# Altium PCB new_GD.PcbDoc
Units mm, origin at the board's own origin, x right, y up, seen from the top; angles counter-clockwise.
Board outline 65.02 x 13.46 mm, 2 copper layers (Top Layer, Bottom Layer); 16 components, 12 nets, 40 pads, 16 vias.
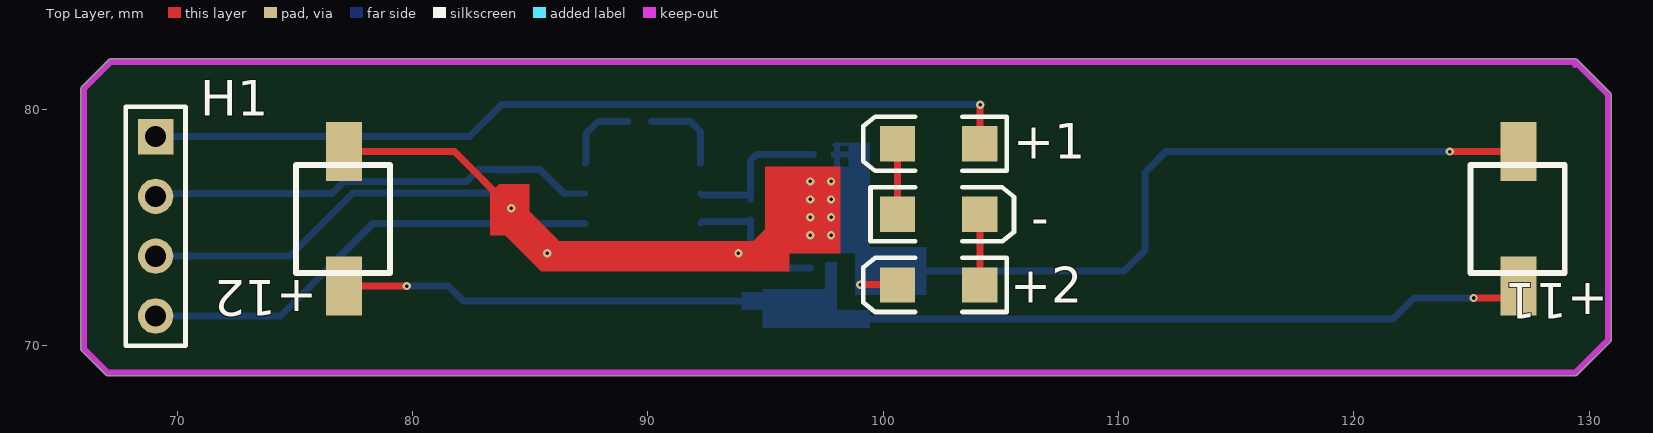
[diagram p0: Top Layer view]
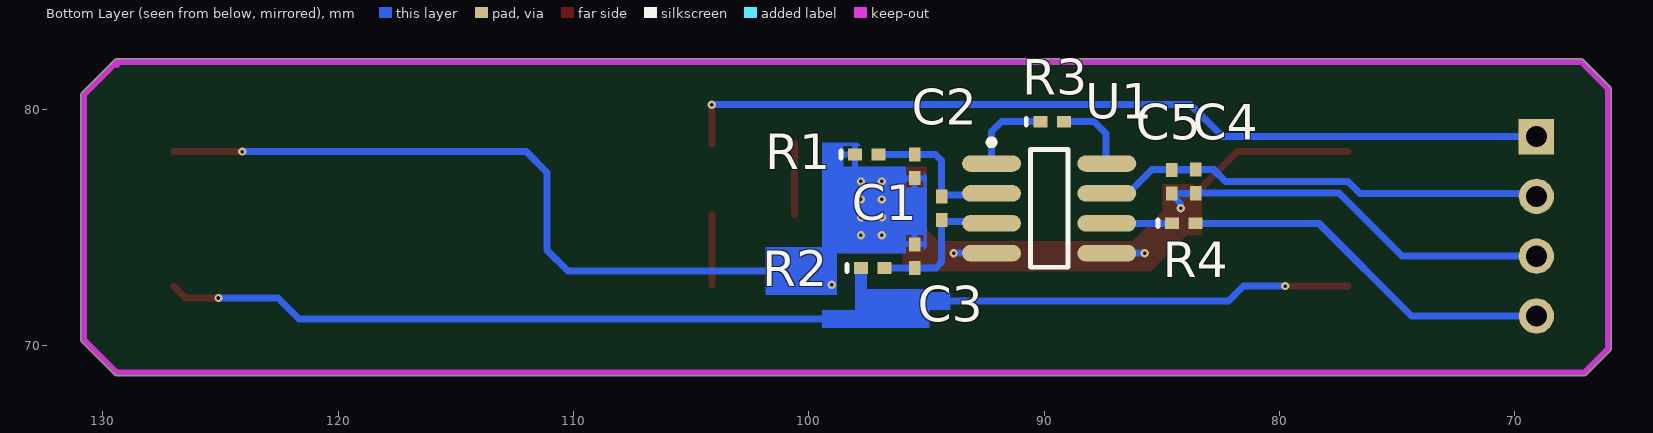
[diagram p1: Bottom Layer view, seen from below]

## Layer stack, top to bottom
Top Solder: solder mask 0.0102, Solder Resist, Dk 3.5
Top Layer: signal copper 0.0356
Dielectric 1: dielectric 0.32, FR-4, Dk 4.8
Bottom Layer: signal copper 0.0356
Bottom Solder: solder mask 0.0102, Solder Resist, Dk 3.5

## Board outline
66.966,68.744 65.95,69.76 65.95,69.759 cw(c66.04,69.85) 65.913,69.85 65.913,80.899 cw(c66.04,80.899) 65.95,80.99 65.95,80.989 67.093,82.132 67.092,82.132 cw(c67.183,82.042) 67.183,82.169 129.413,82.169 cw(c129.413,82.042) 129.504,82.132 129.503,82.132 130.9,80.735 130.9,80.736 cw(c130.81,80.645) 130.937,80.645 130.937,70.231 cw(c130.81,70.231) 130.9,70.14 130.9,70.141 129.503,68.744 129.504,68.744 cw(c129.413,68.834) 129.413,68.707 67.056,68.707 cw(c67.056,68.834)

## Design rules (kind name [scope] priority, off if disabled: settings)
Clearance [All] p1: gap=0 ignorepadtopadclearanceinfootprint=FALSE
PolygonConnect [All] p1: connectstyle=Relief reliefconductorwidth=0.254 reliefentries=4 polygonreliefangle="90 Angle" airgapwidth=0.254
RoutingVias [All] p1: holewidth=0.711 width=1.27 viastyle="Through Hole" minholewidth=0.711 minwidth=1.27 maxholewidth=0.711 maxwidth=1.27
SolderMaskExpansion [All] p1: expansion=0.102
Width [All] p1: maxlimit=1 minlimit=0.1 preferedwidth=0.1 minimp=50.000000 maximp=50.000000 favimp=50.000000
30 further rules are at their usual default settings.

## Classes and differential pairs
component class Sheet1: +1 +2 +12 - C1 C2 C3 C4 C5 H1 R1 R2 R3 R4 U1

## Components (designator, comment, footprint, x,y, rotation, side; value= is the part's Value field where it differs from the comment)
+1 "1206LED" 3.2X1.6X1.1 102.362,78.565 r180 top
+2 "1206LED" 3.2X1.6X1.1 102.362,72.565 r180 top
+11 "BPW34S" BPW34S 124.968,73.152 r90 top
+12 "BPW34S" BPW34S 75.057,73.152 r90 top
- "1206LED" 3.2X1.6X1.1 102.362,75.565 r0 top (schematic designator D2)
C1 "1nF" 0402 94.361,75.819 r90 bottom
C2 "1nF" 0402 95.504,77.605 r90 bottom
C3 "1nF" 0402 95.504,73.787 r90 bottom
C4 "0.1nF" 0402 83.566,76.962 r270 bottom
C5 "10nF" 0402 84.582,76.954 r270 bottom
H1 "Header 4" HDR1X4 69.088,78.867 r270 top
R1 "1K" 0402-A 97.536,78.105 r180 bottom
R2 "1K" 0402-A 97.282,73.279 r180 bottom
R3 "10K" 0402-A 89.662,79.502 r180 bottom
R4 "100R" 0402-A 84.066,75.184 r180 bottom
U1 "AD623" SO8_M 89.789,75.819 r180 bottom

## Footprints (in the part's own frame and the unit in brackets; to place one, negate y for a bottom-side part, rotate by r counter-clockwise, add the part's x,y. Pads: shape width x height; smd on the part's side, far side on the other; paste and mask are expansions set on the pad)
3.2X1.6X1.1 [mm] "SMT LED; 2 Flat Leads"
  rect 1.5x1.5 smd: 1(-1.75,0) 2(1.75,0)
  silkscreen extent -2.9,-1.15 3.2,1.15
0402 [mm] "Chip Capacitor, Body 1.0x0.5mm, IPC High Density"
  rect 0.6x0.5 smd: 1(-0.5,0) 2(0.5,0)
  body extent -0.55,-0.3 0.55,0.3, height 1.3
0402-A [mm] "Chip Inductor, Body 1.0x0.5mm, IPC High Density"
  rect 0.6x0.5 smd: 1(-0.5,0) 2(0.5,0)
  silkscreen extent -1.1,-0.15 -1.1,0.15, body extent -0.55,-0.3 0.55,0.3, height 0.55
BPW34S [mil]
  rect 98.43x60 smd: 1(-25,-80) 2(200,-80)
  silkscreen extent -3,-157 177,0
HDR1X4 [mm] "Connector; Header; 4 Position"
  rect 1.5x1.5 hole 0.9: 1(0,0)
  round 1.5 hole 0.9: 2(2.54,0) 3(5.08,0) 4(7.62,0)
  silkscreen extent -1.27,-1.27 8.89,1.27
SO8_M [mm] "SOIC, 8-Leads, Body 4.9x3.9mm, Pitch 1.27mm, IPC Low Density"
  oval 2.5x0.7 smd: 1(-2.45,1.905) 2(-2.45,0.635) 3(-2.45,-0.635) 4(-2.45,-1.905) 5(2.45,-1.905) 6(2.45,-0.635) 7(2.45,0.635) 8(2.45,1.905)
  silkscreen extent -2.58,-2.5 0.8,2.93, body extent -2,-2.5 2,2.5, height 1.75

## Part data
+1 +2 -: library part LED0, "Typical INFRARED GaAs LED", LatestRevisionDate=08-Jul-2005, LatestRevisionNote="Mech Layer 1 removed.", PackageDescription="LED; 2 Leads", PackageReference=LED-0, Published=8-Jun-2000, Publisher="Altium Limited"
+11 +12: library part "Photo Sen", "Photosensitive Diode", LatestRevisionDate=17-Jul-2002, LatestRevisionNote="Re-released for DXP Platform.", PackageReference=PIN2, Published=24-Mar-1999, Publisher="Altium Limited"
C1 C2 C3 C4 C5: library part CAP, "电容"
H1: "Header, 4-Pin", LatestRevisionDate=17-Jul-2002, LatestRevisionNote="Re-released for DXP Platform.", Publisher="Altium Limited"
R1 R2 R3 R4: library part RES, "电阻"
U1: "IC"

## Via types
v1: diameter 0.35, hole 0.15, Top Layer to Bottom Layer, tented both sides, 16 vias

## Nets (pads, with @x,y where several pads share a name; then routed paths per layer and width w, separated by ;. In a path a pad name is that pad's centre, name@x,y a point inside that pad or via, vN(x,y) a via of type N, cw(c..) or ccw(c..) an arc to the next point about the centre after c; other vN are vias at no path point)
Net+1_1: +1.1 H1.1 | length 37.3
  Top Layer w0.3: +1.1 104.126,78.579 v1(104.126,80.223)
  Bottom Layer w0.3: H1.1 82.423,78.867 83.779,80.223 v1(104.126,80.223)
Net+1_2: +1.2 -.1 | length 3
  Top Layer w0.3: -.1 +1.2
Net+2_1: +2.1 -.2 | length 3
  Top Layer w0.3: +2.1 -.2
Net+2_2: +2.2 +11.2 +12.2 C2.1 C3.2 C4.2 C5.2 H1.3 R1.1 U1.4 U1.5 | length 61.2
  Top Layer w0.3: +12.2 81.788,78.232 v1(84.201,75.819) ; v1(99.03,72.574) 100.603,72.574 +2.2 ; v1(124.079,78.232) +11.2
  Bottom Layer w0.254: 79.114,76.465 79.116,76.463 ; C4.2@83.564,76.463 C4.2 C4.2@83.57,76.458 ; C5.2@84.578,76.458 C5.2
  Bottom Layer w0.3: H1.3 74.803,73.787 77.481,76.465 79.114,76.465 ; 79.116,76.463 C4.2@83.564,76.463 ; C4.2@83.57,76.458 C5.2@84.578,76.458 ; v1(84.201,75.819) 84.211,75.829 84.211,76.033 84.582,76.404 C5.2 ; v1(85.725,73.914) U1.5 ; U1.4 v1(93.853,73.914) ; 100.203,73.152 110.236,73.152 111.125,74.041 111.125,77.343 112.014,78.232 v1(124.079,78.232)
  other v1: 96.901,74.676 97.79,74.676 96.901,75.438 97.79,75.438 96.901,76.2 97.79,76.2 96.901,76.962 97.79,76.962
Net+11_1: +11.1 +12.1 R2.1 | length 50.1
  Top Layer w0.3: +12.1 v1(79.756,72.517) ; v1(125.095,72.009) 126.492,72.009 +11.1
  Bottom Layer w0.3: v1(79.756,72.517) 81.534,72.517 82.169,71.882 95.885,71.882 96.139,71.628 ; 97.028,71.374 97.282,71.12 121.666,71.12 122.555,72.009 v1(125.095,72.009)
NetC1_1: C1.1 C3.1 R2.2 U1.3 | length 6.6
  Bottom Layer w0.254: U1.3 U1.3@92.307,75.252 ; C1.1@94.294,75.252 C1.1 ; C3.1@95.377,73.287 C3.1@95.381,73.283 ; R2.2@96.905,73.283 R2.2@96.909,73.279
  Bottom Layer w0.3: U1.3@92.307,75.252 C1.1@94.294,75.252 ; C1.1 94.361,73.533 94.607,73.287 C3.1@95.377,73.287 ; C3.1@95.381,73.283 R2.2@96.905,73.283
NetC1_2: C1.2 C2.2 R1.2 U1.2 | length 6.5
  Bottom Layer w0.254: U1.2 U1.2@92.307,76.386 ; C1.2@94.294,76.386 C1.2
  Bottom Layer w0.3: U1.2@92.307,76.386 C1.2@94.294,76.386 ; C1.2 94.361,77.851 94.615,78.105 C2.2 R1.2
NetC4_1: C4.1 C5.1 H1.2 U1.7 | length 19.2
  Bottom Layer w0.254: C4.1 C4.1@83.57,77.458 ; C5.1@84.578,77.458 C5.1 C5.1@84.598,77.47 ; U1.7@86.439,76.454 U1.7
  Bottom Layer w0.3: H1.2 69.215,76.454 76.581,76.454 77.092,76.965 82.299,76.965 82.796,77.462 C4.1 ; C4.1@83.57,77.458 C5.1@84.578,77.458 ; C5.1@84.598,77.47 85.423,77.47 U1.7@86.439,76.454
NetH1_4: H1.4 R4.2 | length 16.1
  Bottom Layer w0.3: H1.4 74.396,71.247 78.333,75.184 R4.2
NetR3_1: R3.1 U1.1 | length 3.6
  Bottom Layer w0.3: R3.1 91.821,79.502 92.239,79.084 U1.1
NetR3_2: R3.2 U1.8 | length 3.3
  Bottom Layer w0.254: U1.8 U1.8@87.376,77.761
  Bottom Layer w0.3: U1.8@87.376,77.761 87.376,78.994 87.884,79.502 R3.2
NetR4_1: R4.1 U1.6 | length 2.8
  Bottom Layer w0.3: R4.1 U1.6

## Keep-outs
Keep-Out Layer:
  lines w0.254: 129.413,81.915 129.413,82.042 ; 129.413,82.042 130.81,80.645 130.81,80.518 130.81,70.231 129.413,68.834 67.056,68.834 66.04,69.85 66.04,80.264 66.04,80.899 67.183,82.042 129.413,82.042

## Other copper
Top Layer:
  region net Net+2_2: 85.471,73.152 85.217,73.406 83.947,74.676 83.312,74.676 83.312,76.454 83.693,76.835 84.963,76.835 84.963,75.692 86.233,74.422 86.233,73.533 85.852,73.533
  region net Net+2_2: 98.171,77.597 94.996,77.597 94.996,74.93 94.488,74.422 85.217,74.422 85.217,73.406 85.471,73.152 96.012,73.152 96.012,73.914 98.171,73.914
Bottom Layer:
  rectangle net Net+11_1: 93.98,71.501 94.996,72.263
  rectangle net Net+11_1: 97.917,70.739 99.441,71.501
  rectangle net Net+11_1: 94.869,70.739 98.044,72.39
  rectangle net Net+2_2: 98.806,72.136 101.854,74.168
  rectangle net Net+11_1: 97.536,72.136 98.044,73.533
  rectangle net Net+2_2: 94.996,74.676 96.012,76.708
  rectangle net Net+2_2: 95.377,74.168 95.631,77.216
  rectangle net Net+2_2: 94.996,74.168 96.012,74.422
  rectangle net Net+2_2: 94.996,76.962 96.012,77.216
  rectangle net Net+2_2: 97.79,77.978 98.806,78.232
  rectangle net Net+2_2: 97.917,77.597 98.171,78.613
  region net Net+2_2: 95.123,77.343 94.996,77.216 94.996,74.168 95.123,74.041
  region net Net+2_2: 98.552,78.613 97.917,78.613 97.79,78.486 98.679,78.486
  region net Net+2_2: 98.552,78.613 98.552,77.597 95.885,77.597 95.885,73.914 99.314,73.914 99.441,74.041 99.441,78.613